# Altium PCB 底板20160428.PcbDoc (part 2 of 5)
Units mm, origin at the board's own origin, x right, y up, seen from the top; angles counter-clockwise.
Board outline 123.5 x 102.51 mm, 2 copper layers (Top Layer, Bottom Layer); 219 components, 217 nets, 791 pads, 260 vias.
Unrouted connection lines stored in the file: 1.
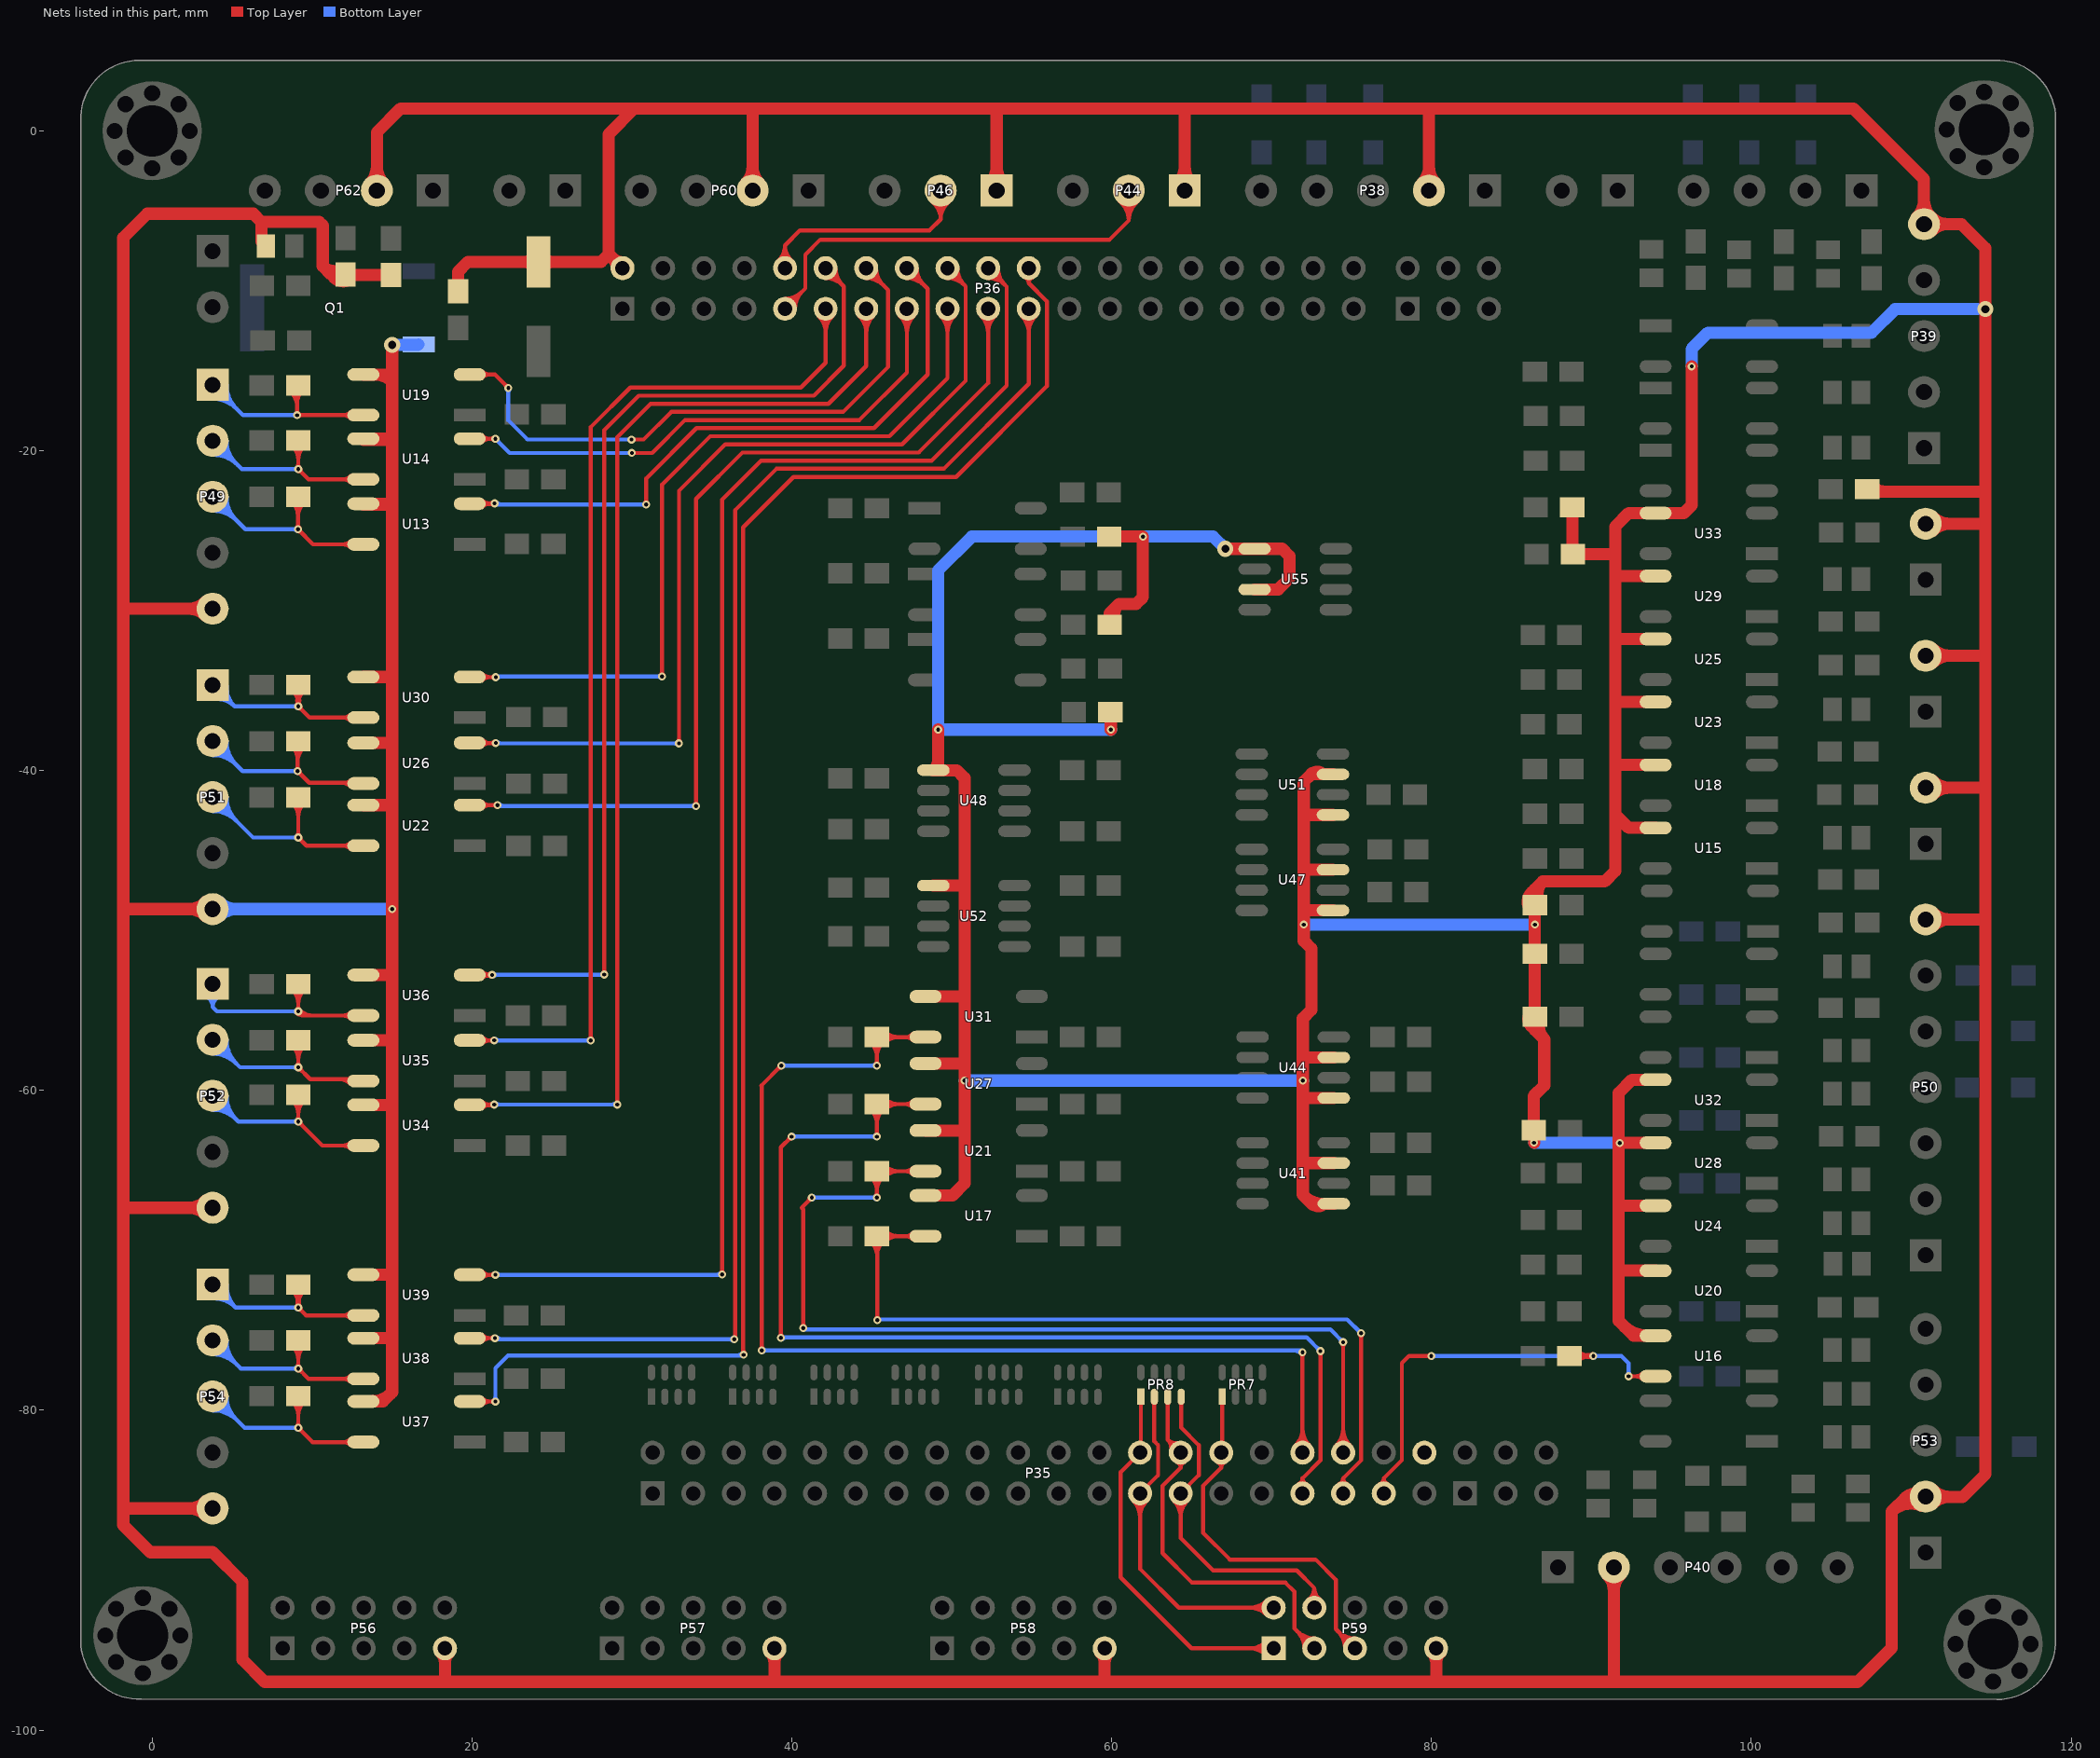
[diagram p2: the nets of this part, all layers, seen from the top]

## Via types
v1: diameter 0.5, hole 0.25, Top Layer to Bottom Layer, 233 vias
v2: diameter 1, hole 0.5, Top Layer to Bottom Layer, 27 vias

## Nets (pads, with @x,y where several pads share a name; then routed paths per layer and width w, separated by ;. In a path a pad name is that pad's centre, name@x,y a point inside that pad or via, vN(x,y) a via of type N, cw(c..) or ccw(c..) an arc to the next point about the centre after c; other vN are vias at no path point) (continued)
CDH4_KR4: P35.30 P59.5 PR7.1 | length 28.4
  Top Layer w0.254: P35.30@66.61,-83.225 cw(c66.454,-83.592) 66.853,-83.592 ; PR7.1@66.836,-79.506 cw(c66.663,-79.68) 66.908,-79.68 cw(c67.153,-79.68) PR7.1@66.98,-79.506 ; PR7.1@66.908,-79.155 66.908,-82.596 P35.30@66.853,-82.652 66.853,-83.592 ; P35.30@67.096,-83.225 ccw(c67.251,-83.592) 66.853,-83.592 ; P59.5@74.586,-94.884 ccw(c73.082,-94.884) 74.146,-93.821 ccw(c75.209,-92.757) P59.5@75.209,-94.261 ; P59.5@74.84,-94.884 ccw(c73.95,-94.884) 74.579,-94.254 ccw(c75.209,-93.625) P59.5@75.209,-94.515 ; P59.5@75.209,-94.884 74.016,-93.691 74.016,-90.602 72.746,-89.332 67.386,-89.332 65.722,-87.667 65.722,-84.723 66.853,-83.592
CDH4_KR5: P35.27 P59.4 PR8.4 | length 26.5
  Top Layer w0.254: P35.27@63.872,-85.632 cw(c62.809,-86.696) 64.313,-86.696 cw(c65.817,-86.696) P35.27@64.753,-85.632 ; P35.27@64.052,-85.453 cw(c63.422,-86.082) 64.313,-86.082 cw(c65.204,-86.082) P35.27@64.574,-85.453 ; PR8.4@64.271,-79.506 cw(c64.097,-79.68) 64.343,-79.68 cw(c64.588,-79.68) PR8.4@64.415,-79.506 ; PR8.4@64.343,-79.155 64.343,-81.082 65.444,-82.183 65.444,-84.061 P35.27@64.313,-85.192 64.313,-87.986 66.345,-90.018 71.577,-90.018 72.669,-91.11 ; P59.4@72.299,-91.843 ccw(c71.758,-91.11) 72.669,-91.11 ; P59.4@72.669,-92.344 72.669,-91.11 ; P59.4@73.039,-91.843 cw(c73.581,-91.11) 72.669,-91.11
CDH4_KR6: P35.28 P59.3 PR8.3 | length 30.4
  Top Layer w0.254: PR8.3@63.433,-79.506 cw(c63.259,-79.68) 63.504,-79.68 cw(c63.75,-79.68) PR8.3@63.576,-79.506 ; PR8.3@63.504,-79.155 63.504,-81.843 ; P35.28@63.704,-82.52 ccw(c62.983,-82.365) 63.504,-81.843 ; P35.28@64.07,-83.225 cw(c63.914,-83.592) 64.313,-83.592 ; P35.28@64.181,-82.043 cw(c64.026,-81.322) 63.504,-81.843 ; P35.28@64.556,-83.225 ccw(c64.711,-83.592) 64.313,-83.592 ; P59.3@72.046,-94.884 ccw(c70.542,-94.884) 71.606,-93.821 ccw(c72.669,-92.757) P59.3@72.669,-94.261 ; P59.3@72.3,-94.884 ccw(c71.41,-94.884) 72.039,-94.254 ccw(c72.669,-93.625) P59.3@72.669,-94.515 ; P59.3@72.669,-94.884 71.425,-93.64 71.425,-91.338 70.866,-90.78 65.024,-90.78 63.182,-88.937 63.182,-84.723 64.313,-83.592 ; 63.504,-81.843 P35.28@64.313,-82.652 64.313,-83.592
CDH4_KR7: P35.25 P59.2 PR8.2 | length 28.6
  Top Layer w0.254: P35.25@61.332,-85.632 cw(c60.269,-86.696) 61.773,-86.696 cw(c63.277,-86.696) P35.25@62.213,-85.632 ; P35.25@61.512,-85.453 cw(c60.882,-86.082) 61.773,-86.082 cw(c62.664,-86.082) P35.25@62.034,-85.453 ; PR8.2@62.594,-79.506 cw(c62.421,-79.68) 62.666,-79.68 cw(c62.912,-79.68) PR8.2@62.738,-79.506 ; PR8.2@62.666,-79.155 62.666,-81.946 62.904,-82.183 62.904,-84.061 P35.25@61.773,-85.192 61.773,-89.916 64.201,-92.344 P59.2@70.129,-92.344 ; P59.2@69.689,-92.785 ccw(c68.625,-93.848) 68.625,-92.344 ccw(c68.625,-90.84) P59.2@69.689,-91.904 ; P59.2@69.868,-92.605 ccw(c69.239,-93.235) 69.239,-92.344 ccw(c69.239,-91.454) P59.2@69.868,-92.083
CDH4_KR8: P35.26 P59.1 PR8.1 | length 27.4
  Top Layer w0.254: PR8.1@61.756,-79.506 cw(c61.583,-79.68) 61.828,-79.68 cw(c62.073,-79.68) PR8.1@61.9,-79.506 ; PR8.1@61.828,-79.155 61.828,-82.596 P35.26@61.773,-82.652 60.554,-83.871 60.554,-90.449 64.989,-94.884 P59.1@70.129,-94.884 ; P59.1@69.689,-95.325 ccw(c68.625,-96.388) 68.625,-94.884 ccw(c68.625,-93.38) P59.1@69.689,-94.444 ; P59.1@69.868,-95.145 ccw(c69.239,-95.775) 69.239,-94.884 ccw(c69.239,-93.994) P59.1@69.868,-94.623
DJ1_KC1: P36.16 U13.3 | length 47.2
  Top Layer w0.254: U13.3@19.863,-23.292 v1(21.412,-23.292) v1@21.416,-23.292 ; U13.3@20.651,-23.509 cw(c21.176,-24.034) v1@21.176,-23.292 ; U13.3@20.651,-23.123 ccw(c21.058,-22.716) 21.058,-23.292 ; 20.967,-23.348 cw(c21.098,-23.836) v1@21.351,-23.398 ; v1@21.325,-23.379 ccw(c21.115,-23.589) 21.115,-23.292 ccw(c21.115,-22.995) v1@21.325,-23.205 ; v1@30.799,-23.281 ccw(c30.589,-23.071) 30.886,-23.071 ccw(c31.183,-23.071) v1@30.973,-23.281 ; v1(30.886,-23.368) 30.886,-21.742 34.036,-18.593 45.136,-18.593 48.489,-15.24 48.489,-9.881 P36.16@47.193,-8.585 ; P36.16@47.193,-9.208 cw(c47.193,-10.712) 48.257,-9.649 cw(c49.32,-8.585) P36.16@47.816,-8.585 ; P36.16@47.193,-8.954 cw(c47.193,-9.845) 47.823,-9.215 cw(c48.453,-8.585) P36.16@47.562,-8.585
  Bottom Layer w0.254: v1(21.412,-23.292) 21.488,-23.368 v1(30.886,-23.368) ; v1@21.499,-23.205 ccw(c21.893,-22.811) 21.893,-23.368 ; v1@30.799,-23.455 ccw(c30.589,-23.665) 30.589,-23.368 ccw(c30.589,-23.071) v1@30.799,-23.281
DJ1_KC2: P36.15 U14.3 | length 39.5
  Top Layer w0.254: U14.3@19.863,-19.253 v1@21.416,-19.253 ; U14.3@20.651,-19.445 cw(c21.115,-19.909) 21.115,-19.253 ; U14.3@20.651,-19.059 ccw(c21.12,-18.591) 21.12,-19.253 ; v1@21.376,-19.34 ccw(c21.166,-19.55) 21.166,-19.253 ccw(c21.166,-18.956) v1@21.376,-19.166 ; v1(29.997,-20.142) 31.267,-20.142 33.325,-18.085 44.221,-18.085 47.193,-15.113 P36.15@47.193,-11.125 ; P36.15@46.753,-11.566 cw(c45.689,-12.629) 47.193,-12.629 cw(c48.697,-12.629) P36.15@47.634,-11.566 ; P36.15@46.932,-11.386 cw(c46.302,-12.016) 47.193,-12.016 cw(c48.084,-12.016) P36.15@47.454,-11.386
  Bottom Layer w0.254: v1@21.463,-19.376 cw(c21.463,-19.673) 21.673,-19.463 cw(c21.883,-19.253) v1@21.586,-19.253 ; v1(21.463,-19.253) 22.352,-20.142 v1(29.997,-20.142)
DJ1_KC3: P36.14 U19.3 | length 43.4
  Top Layer w0.254: U19.3@19.858,-15.239 21.437,-15.239 v1(22.276,-16.078) ; U19.3@20.651,-15.432 cw(c21.117,-15.898) 21.117,-15.239 cw(c21.117,-14.58) U19.3@20.651,-15.046 ; v1@22.153,-16.078 ccw(c21.856,-16.078) 22.066,-15.868 ccw(c22.276,-15.658) v1@22.276,-15.955 ; v1(29.972,-19.304) 30.734,-19.304 32.461,-17.577 43.205,-17.577 46.025,-14.757 46.025,-9.957 P36.14@44.653,-8.585 ; P36.14@44.653,-9.208 cw(c44.653,-10.712) 45.717,-9.649 cw(c46.78,-8.585) P36.14@45.276,-8.585 ; P36.14@44.653,-8.954 cw(c44.653,-9.845) 45.283,-9.215 cw(c45.913,-8.585) P36.14@45.022,-8.585
  Bottom Layer w0.254: v1@22.189,-16.165 cw(c21.979,-16.375) 22.276,-16.375 cw(c22.573,-16.375) v1@22.363,-16.165 ; v1(22.276,-16.078) 22.276,-18.11 23.47,-19.304 v1(29.972,-19.304)
DJ1_KC11: P49.3 R43.1 U13.6 | length 23.2
  Top Layer w0.254: R43.1@8.777,-23.238 cw(c7.952,-24.063) 9.119,-24.063 ; v1@9.032,-24.83 ccw(c8.822,-24.62) 9.119,-24.62 ccw(c9.416,-24.62) v1@9.206,-24.83 ; v1@9.119,-25.04 cw(c9.119,-25.337) 9.329,-25.127 cw(c9.539,-24.917) v1@9.242,-24.917 ; 9.119,-24.147 cw(c10.405,-24.147) R43.1@9.495,-23.238 ; 9.119,-23.534 cw(c9.792,-23.534) R43.1@9.316,-23.058 ; R43.1@9.136,-22.879 9.119,-22.896 v1(9.119,-24.917) 10.057,-25.856 U13.6@13.208,-25.856 ; U13.6@12.415,-26.049 ccw(c11.949,-26.515) 11.949,-25.856 ccw(c11.949,-25.197) U13.6@12.415,-25.663
  Bottom Layer w0.254: P49.3@3.785,-23.756 cw(c3.785,-25.884) 5.289,-24.379 ; P49.3@3.785,-23.502 cw(c3.785,-25.016) 4.856,-23.945 ; P49.3@3.789,-22.879 5.828,-24.917 v1(9.119,-24.917) ; P49.3@4.404,-22.883 ccw(c5.878,-22.883) 4.835,-23.925 ; P49.3@4.658,-22.883 ccw(c6.745,-22.883) 5.269,-24.359 ; v1@9.032,-25.004 ccw(c8.822,-25.214) 8.822,-24.917 ccw(c8.822,-24.62) v1@9.032,-24.83
DJ1_KC22: P49.2 R45.1 U14.6 | length 22.2
  Top Layer w0.254: R45.1@8.777,-19.714 cw(c7.91,-20.581) 9.136,-20.581 cw(c10.363,-20.581) R45.1@9.495,-19.714 ; v1@9.049,-21.063 ccw(c8.839,-20.853) 9.136,-20.853 ccw(c9.433,-20.853) v1@9.223,-21.063 ; v1@9.136,-21.273 cw(c9.136,-21.57) 9.346,-21.36 cw(c9.556,-21.15) v1@9.259,-21.15 ; R45.1@9.136,-19.355 v1(9.136,-21.15) 9.778,-21.792 U14.6@13.208,-21.792 ; U14.6@12.415,-21.985 ccw(c11.949,-22.451) 11.949,-21.792 ccw(c11.949,-21.133) U14.6@12.415,-21.599
  Bottom Layer w0.254: P49.2@3.785,-20.256 cw(c3.785,-22.499) 5.371,-20.913 ; P49.2@3.785,-20.002 cw(c3.785,-21.631) 4.937,-20.479 ; P49.2@3.813,-19.355 5.608,-21.15 v1(9.136,-21.15) ; P49.2@4.404,-19.383 ccw(c5.763,-19.383) 4.802,-20.344 ; P49.2@4.658,-19.383 ccw(c6.63,-19.383) 5.235,-20.777 ; v1@9.049,-21.237 ccw(c8.839,-21.447) 8.839,-21.15 ccw(c8.839,-20.853) v1@9.049,-21.063
DJ1_KC33: P49.1 R54.1 U19.6 | length 22.7
  Top Layer w0.254: R54.1@8.65,-16.278 cw(c7.641,-17.287) 9.068,-17.287 ; R54.1@8.83,-16.099 cw(c8.254,-16.674) 9.068,-16.674 ; v1@8.981,-17.693 ccw(c8.771,-17.483) 9.068,-17.483 ccw(c9.365,-17.483) 9.155,-17.693 ccw(c9.365,-17.483) 9.365,-17.78 ccw(c9.365,-18.077) v1@9.155,-17.867 ; 9.068,-17.004 cw(c10.094,-17.004) R54.1@9.368,-16.278 ; R54.1@9.136,-15.919 9.068,-15.987 v1(9.068,-17.78) 9.65,-17.78 9.651,-17.779 U19.6@13.208,-17.779 ; U19.6@12.415,-17.972 ccw(c11.949,-18.438) 11.949,-17.779 ccw(c11.949,-17.12) U19.6@12.415,-17.586
  Bottom Layer w0.254: P49.1@3.785,-16.756 cw(c3.785,-18.863) 5.275,-17.373 cw(c6.765,-15.883) P49.1@4.658,-15.883 ; P49.1@3.785,-16.502 cw(c3.785,-17.996) 4.841,-16.94 cw(c5.898,-15.883) P49.1@4.404,-15.883 ; P49.1@3.821,-15.919 5.682,-17.78 v1(9.068,-17.78) ; v1@8.981,-17.867 ccw(c8.771,-18.077) 8.771,-17.78 ccw(c8.771,-17.483) v1@8.981,-17.693
DJ2_KC1: P36.19 U22.3 | length 65.9
  Top Layer w0.254: U22.3@19.859,-42.164 v1(21.59,-42.164) ; U22.3@20.651,-42.356 cw(c21.115,-42.82) 21.115,-42.164 ; U22.3@20.651,-41.97 ccw(c21.12,-41.501) 21.12,-42.164 ; v1@21.503,-42.251 ccw(c21.293,-42.461) 21.293,-42.164 ccw(c21.293,-41.867) v1@21.503,-42.077 ; v1@33.924,-42.128 ccw(c33.714,-41.918) 34.011,-41.918 ccw(c34.308,-41.918) v1@34.098,-42.128 ; v1(34.011,-42.215) 34.011,-23.012 36.906,-20.117 47.93,-20.117 52.273,-15.773 P36.19@52.273,-11.125 ; P36.19@51.833,-11.566 cw(c50.769,-12.629) 52.273,-12.629 cw(c53.777,-12.629) P36.19@52.714,-11.566 ; P36.19@52.012,-11.386 cw(c51.382,-12.016) 52.273,-12.016 cw(c53.164,-12.016) P36.19@52.534,-11.386
  Bottom Layer w0.254: v1(21.59,-42.164) 21.641,-42.215 v1(34.011,-42.215) ; v1@21.677,-42.077 ccw(c22.01,-41.744) 22.01,-42.215 ; v1@33.924,-42.302 ccw(c33.714,-42.512) 33.714,-42.215 ccw(c33.714,-41.918) v1@33.924,-42.128
DJ2_KC2: P36.18 U26.3 | length 63.7
  Top Layer w0.254: U26.3@19.866,-38.278 v1(21.488,-38.278) ; U26.3@20.651,-38.463 cw(c21.098,-38.91) 21.098,-38.278 ; U26.3@20.651,-38.077 ccw(c21.136,-37.592) 21.136,-38.278 ; v1@21.401,-38.365 ccw(c21.191,-38.575) 21.191,-38.278 ccw(c21.191,-37.981) v1@21.401,-38.191 ; v1@32.857,-38.216 ccw(c32.647,-38.006) 32.944,-38.006 ccw(c33.241,-38.006) v1@33.031,-38.216 ; v1(32.944,-38.303) 32.944,-22.504 35.839,-19.609 46.888,-19.609 50.869,-15.628 50.869,-9.721 P36.18@49.733,-8.585 ; P36.18@49.733,-9.208 cw(c49.733,-10.712) 50.797,-9.649 cw(c51.86,-8.585) P36.18@50.356,-8.585 ; P36.18@49.733,-8.954 cw(c49.733,-9.845) 50.363,-9.215 cw(c50.993,-8.585) P36.18@50.102,-8.585
  Bottom Layer w0.254: v1(21.488,-38.278) 21.514,-38.303 v1(32.944,-38.303) ; v1@21.575,-38.191 ccw(c21.847,-37.92) 21.847,-38.303 ; v1@32.857,-38.39 ccw(c32.647,-38.6) 32.647,-38.303 ccw(c32.647,-38.006) v1@32.857,-38.216
DJ2_KC3: P36.17 U30.3 | length 55.6
  Top Layer w0.254: U30.3@19.871,-34.163 v1(21.488,-34.163) ; U30.3@20.651,-34.343 cw(c21.087,-34.779) 21.087,-34.163 ; U30.3@20.651,-33.957 ccw(c21.147,-33.461) 21.147,-34.163 ; v1@21.401,-34.25 ccw(c21.191,-34.46) 21.191,-34.163 ccw(c21.191,-33.866) v1@21.401,-34.076 ; v1@31.79,-34.025 ccw(c31.58,-33.815) 31.877,-33.815 ccw(c32.174,-33.815) v1@31.964,-34.025 ; v1(31.877,-34.112) 31.877,-22.123 34.9,-19.101 46.101,-19.101 49.733,-15.469 P36.17@49.733,-11.125 ; P36.17@49.293,-11.566 cw(c48.229,-12.629) 49.733,-12.629 cw(c51.237,-12.629) P36.17@50.174,-11.566 ; P36.17@49.472,-11.386 cw(c48.842,-12.016) 49.733,-12.016 cw(c50.624,-12.016) P36.17@49.994,-11.386
  Bottom Layer w0.254: v1@21.539,-34.214 v1(21.488,-34.163) 21.539,-34.112 v1(31.877,-34.112) ; v1@21.575,-34.25 cw(c21.908,-34.583) 21.908,-34.112 ; v1@31.79,-34.199 ccw(c31.58,-34.409) 31.58,-34.112 ccw(c31.58,-33.815) v1@31.79,-34.025
DJ2_KC11: P51.3 R61.1 U22.6 | length 23.2
  Top Layer w0.254: R61.1@8.777,-42.034 cw(c7.91,-42.901) 9.136,-42.901 cw(c10.363,-42.901) R61.1@9.495,-42.034 ; v1@9.049,-44.101 ccw(c8.839,-43.891) 9.136,-43.891 ccw(c9.433,-43.891) v1@9.223,-44.101 ; v1@9.136,-44.311 cw(c9.136,-44.608) 9.346,-44.398 cw(c9.556,-44.188) v1@9.259,-44.188 ; R61.1@9.136,-41.675 v1(9.136,-44.188) 9.651,-44.703 U22.6@13.208,-44.703 ; U22.6@12.415,-44.896 ccw(c11.949,-45.362) 11.949,-44.703 ccw(c11.949,-44.044) U22.6@12.415,-44.51
  Bottom Layer w0.254: P51.3@3.785,-42.535 cw(c3.785,-44.643) 5.275,-43.153 cw(c6.765,-41.662) P51.3@4.658,-41.662 ; P51.3@3.785,-42.281 cw(c3.785,-43.776) 4.841,-42.719 cw(c5.898,-41.662) P51.3@4.404,-41.662 ; P51.3@3.797,-41.675 6.311,-44.188 v1(9.136,-44.188) ; v1@9.049,-44.275 ccw(c8.839,-44.485) 8.839,-44.188 ccw(c8.839,-43.891) v1@9.049,-44.101
DJ2_KC22: P51.2 R69.1 U26.6 | length 23
  Top Layer w0.254: R69.1@8.777,-38.529 cw(c8.013,-39.292) 9.093,-39.292 ; v1@9.006,-39.943 ccw(c8.796,-39.733) 9.093,-39.733 ccw(c9.39,-39.733) v1@9.18,-39.943 ; v1@9.093,-40.153 cw(c9.093,-40.45) 9.303,-40.24 cw(c9.513,-40.03) v1@9.216,-40.03 ; 9.093,-39.499 cw(c10.466,-39.499) R69.1@9.495,-38.529 ; 9.093,-38.886 cw(c9.853,-38.886) R69.1@9.316,-38.349 ; R69.1@9.136,-38.169 9.093,-38.212 v1(9.093,-40.03) 9.823,-40.76 13.208,-40.76 U26.6@13.208,-40.81 ; 11.829,-40.76 cw(c11.829,-41.589) U26.6@12.415,-41.003 ; 12.069,-40.76 ccw(c12.069,-40.271) U26.6@12.415,-40.617
  Bottom Layer w0.254: P51.2@3.785,-39.035 cw(c3.785,-41.143) 5.275,-39.653 cw(c6.765,-38.162) P51.2@4.658,-38.162 ; P51.2@3.785,-38.781 cw(c3.785,-40.276) 4.841,-39.219 cw(c5.898,-38.162) P51.2@4.404,-38.162 ; P51.2@3.792,-38.169 5.653,-40.03 v1(9.093,-40.03) ; v1@9.006,-40.117 ccw(c8.796,-40.327) 8.796,-40.03 ccw(c8.796,-39.733) v1@9.006,-39.943
DJ2_KC33: P51.1 R77.1 U30.6 | length 21.4
  Top Layer w0.254: R77.1@8.777,-34.998 cw(c7.91,-35.865) 9.136,-35.865 cw(c10.363,-35.865) R77.1@9.495,-34.998 ; v1@9.03,-35.922 ccw(c8.682,-35.722) 9.07,-35.618 ; v1@9.049,-35.897 ccw(c8.839,-35.687) 9.136,-35.687 ccw(c9.433,-35.687) v1@9.223,-35.897 ; v1@9.136,-36.107 cw(c9.136,-36.404) 9.346,-36.194 cw(c9.556,-35.984) v1@9.259,-35.984 ; R77.1@9.136,-34.639 v1(9.136,-35.984) 9.843,-36.69 U30.6@13.208,-36.69 ; 9.203,-35.618 ccw(c9.591,-35.722) v1@9.243,-35.922 ; U30.6@12.415,-36.883 ccw(c11.949,-37.35) 11.949,-36.69 ccw(c11.949,-36.031) U30.6@12.415,-36.497
  Bottom Layer w0.254: P51.1@3.808,-34.639 5.153,-35.984 v1(9.136,-35.984) ; P51.1@3.849,-35.278 cw(c3.967,-36.416) P51.1@4.776,-35.607 ; P51.1@3.875,-35.531 cw(c4.038,-37.099) 5.153,-35.984 cw(c6.356,-34.781) P51.1@4.657,-34.703 ; P51.1@4.403,-34.691 ccw(c5.578,-34.745) P51.1@4.746,-35.577 ; v1@9.049,-36.071 ccw(c8.839,-36.281) 8.839,-35.984 ccw(c8.839,-35.687) v1@9.049,-35.897
DJ3_KC1: P36.13 U34.3 | length 78.5
  Top Layer w0.254: U34.3@19.858,-60.908 19.882,-60.884 v1(21.387,-60.884) ; U34.3@20.651,-61.101 cw(c21.176,-61.626) v1@21.176,-60.884 ; U34.3@20.651,-60.715 ccw(c21.058,-60.308) 21.058,-60.884 ; 20.959,-60.942 cw(c21.084,-61.409) v1@21.325,-60.99 ; v1@21.3,-60.971 ccw(c21.09,-61.181) 21.09,-60.884 ccw(c21.09,-60.587) v1@21.3,-60.797 ; v1(29.083,-60.884) 29.083,-19.152 31.166,-17.069 42.291,-17.069 44.653,-14.707 P36.13@44.653,-11.125 ; P36.13@44.213,-11.566 cw(c43.149,-12.629) 44.653,-12.629 cw(c46.157,-12.629) P36.13@45.094,-11.566 ; P36.13@44.392,-11.386 cw(c43.762,-12.016) 44.653,-12.016 cw(c45.544,-12.016) P36.13@44.914,-11.386
  Bottom Layer w0.254: v1(21.387,-60.884) v1(29.083,-60.884) ; v1@21.474,-60.971 cw(c21.684,-61.181) 21.684,-60.884 cw(c21.684,-60.587) v1@21.474,-60.797 ; v1@28.996,-60.971 ccw(c28.786,-61.181) 28.786,-60.884 ccw(c28.786,-60.587) v1@28.996,-60.797
DJ3_KC2: P36.11 U35.3 | length 72.3
  Top Layer w0.254: U35.3@19.858,-56.87 v1(21.386,-56.87) ; U35.3@20.651,-57.063 cw(c21.117,-57.529) 21.117,-56.87 cw(c21.117,-56.211) U35.3@20.651,-56.677 ; v1@21.299,-56.957 ccw(c21.089,-57.167) 21.089,-56.87 ccw(c21.089,-56.573) v1@21.299,-56.783 ; v1@27.345,-56.784 ccw(c27.135,-56.574) 27.432,-56.574 ccw(c27.729,-56.574) v1@27.519,-56.784 ; v1(27.432,-56.871) 27.432,-18.517 29.896,-16.053 40.564,-16.053 42.113,-14.503 P36.11@42.113,-11.125 ; P36.11@41.673,-11.566 cw(c40.609,-12.629) 42.113,-12.629 cw(c43.617,-12.629) P36.11@42.554,-11.566 ; P36.11@41.852,-11.386 cw(c41.222,-12.016) 42.113,-12.016 cw(c43.004,-12.016) P36.11@42.374,-11.386
  Bottom Layer w0.254: v1(21.386,-56.87) v1(27.432,-56.871) v1(27.432,-56.871) ; v1@21.473,-56.957 cw(c21.683,-57.167) 21.683,-56.87 cw(c21.683,-56.573) v1@21.473,-56.783 ; 27.133,-56.87 cw(c27.133,-57.17) v1@27.345,-56.958 ; 27.138,-56.87 ccw(c27.138,-56.576) v1@27.345,-56.784
DJ3_KC3: P36.12 U36.3 | length 72.8
  Top Layer w0.254: U36.3@19.858,-52.78 v1(21.259,-52.78) ; U36.3@20.651,-52.973 cw(c21.117,-53.439) 21.117,-52.78 cw(c21.117,-52.121) U36.3@20.651,-52.587 ; 20.877,-52.845 cw(c20.986,-53.252) v1@21.197,-52.887 ; 20.877,-52.716 ccw(c20.986,-52.308) v1@21.197,-52.674 ; v1@21.172,-52.867 ccw(c20.962,-53.077) 20.962,-52.78 ccw(c20.962,-52.483) v1@21.172,-52.693 ; v1@28.183,-52.669 ccw(c27.973,-52.459) 28.27,-52.459 ccw(c28.567,-52.459) v1@28.357,-52.669 ; v1(28.27,-52.756) 28.27,-18.72 30.429,-16.561 41.377,-16.561 43.253,-14.685 43.253,-9.725 P36.12@42.113,-8.585 ; P36.12@42.113,-9.208 cw(c42.113,-10.712) 43.177,-9.649 cw(c44.24,-8.585) P36.12@42.736,-8.585 ; P36.12@42.113,-8.954 cw(c42.113,-9.845) 42.743,-9.215 cw(c43.373,-8.585) P36.12@42.482,-8.585
  Bottom Layer w0.254: v1(21.259,-52.78) 28.246,-52.78 v1(28.27,-52.756) ; v1@21.346,-52.867 cw(c21.556,-53.077) 21.556,-52.78 cw(c21.556,-52.483) v1@21.346,-52.693 ; 27.914,-52.78 ccw(c27.914,-52.4) v1@28.183,-52.669
DJ3_KC11: P52.3 R85.1 U34.6 | length 22.4
  Top Layer w0.254: R85.1@8.777,-60.627 cw(c7.91,-61.494) 9.136,-61.494 cw(c10.363,-61.494) R85.1@9.495,-60.627 ; v1@9.049,-61.856 ccw(c8.839,-61.646) 9.136,-61.646 ccw(c9.433,-61.646) v1@9.223,-61.856 ; v1@9.136,-62.066 cw(c9.136,-62.363) 9.346,-62.153 cw(c9.556,-61.943) v1@9.259,-61.943 ; R85.1@9.136,-60.267 v1(9.136,-61.943) 10.642,-63.448 U34.6@13.208,-63.448 ; U34.6@12.415,-63.641 ccw(c11.949,-64.107) 11.949,-63.448 ccw(c11.949,-62.789) U34.6@12.415,-63.255
  Bottom Layer w0.254: P52.3@3.785,-61.212 cw(c3.785,-63.32) 5.275,-61.829 cw(c6.765,-60.339) P52.3@4.658,-60.339 ; P52.3@3.785,-60.958 cw(c3.785,-62.452) 4.841,-61.396 cw(c5.898,-60.339) P52.3@4.404,-60.339 ; P52.3@3.785,-60.339 5.388,-61.943 v1(9.136,-61.943) ; v1@9.049,-62.03 ccw(c8.839,-62.24) 8.839,-61.943 ccw(c8.839,-61.646) v1@9.049,-61.856
DJ3_KC22: P52.2 R87.1 U35.6 | length 22.3
  Top Layer w0.254: R87.1@8.777,-57.223 cw(c7.91,-58.09) 9.136,-58.09 cw(c10.363,-58.09) R87.1@9.495,-57.223 ; v1@9.049,-58.468 ccw(c8.839,-58.258) 9.136,-58.258 ccw(c9.433,-58.258) v1@9.223,-58.468 ; v1@9.136,-58.678 cw(c9.136,-58.975) 9.346,-58.765 cw(c9.556,-58.555) v1@9.259,-58.555 ; R87.1@9.136,-56.864 v1(9.136,-58.555) 9.883,-59.302 13.208,-59.302 U35.6@13.208,-59.41 ; 11.69,-59.302 cw(c11.69,-60.328) U35.6@12.415,-59.603 ; 12.208,-59.302 ccw(c12.208,-59.01) U35.6@12.415,-59.217
  Bottom Layer w0.254: P52.2@3.785,-57.712 cw(c3.785,-59.82) 5.275,-58.329 cw(c6.765,-56.839) P52.2@4.658,-56.839 ; P52.2@3.785,-57.458 cw(c3.785,-58.952) 4.841,-57.896 cw(c5.898,-56.839) P52.2@4.404,-56.839 ; P52.2@3.785,-56.839 5.5,-58.555 v1(9.136,-58.555) ; v1@9.049,-58.642 ccw(c8.839,-58.852) 8.839,-58.555 ccw(c8.839,-58.258) v1@9.049,-58.468
DJ3_KC33: P52.1 R89.1 U36.6 | length 21.4
  Top Layer w0.254: R89.1@8.777,-53.718 cw(c7.91,-54.585) 9.136,-54.585 cw(c10.363,-54.585) R89.1@9.495,-53.718 ; v1@9.043,-55.152 ccw(c9.45,-54.746) 9.45,-55.32 ; v1@9.049,-54.972 ccw(c8.839,-54.762) 9.136,-54.762 ccw(c9.433,-54.762) 9.223,-54.972 ccw(c10.063,-54.133) 10.063,-55.32 ; v1@9.136,-55.182 cw(c9.136,-55.479) 9.346,-55.269 cw(c9.556,-55.059) v1@9.259,-55.059 ; R89.1@9.136,-53.359 v1(9.136,-55.059) 9.397,-55.32 U36.6@13.208,-55.32 ; U36.6@12.415,-55.513 ccw(c11.949,-55.979) 11.949,-55.32 ccw(c11.949,-54.661) U36.6@12.415,-55.127
  Bottom Layer w0.254: P52.1@3.377,-54.111 cw(c3.019,-54.788) 3.785,-54.788 ; P52.1@3.495,-53.886 cw(c3.242,-54.366) 3.785,-54.366 cw(c4.327,-54.366) P52.1@4.074,-53.886 ; P52.1@3.785,-53.339 3.785,-54.788 ; P52.1@4.192,-54.111 ccw(c4.55,-54.788) 3.785,-54.788 ; v1@9.049,-55.146 ccw(c8.839,-55.356) 8.839,-55.059 ccw(c8.839,-54.762) v1@9.049,-54.972 ; v1(9.136,-55.059) 4.056,-55.059 3.785,-54.788
DJ4_KC1: P36.22 U37.3 | length 105.4
  Top Layer w0.254: U37.3@19.859,-79.451 v1(21.463,-79.451) ; U37.3@20.651,-79.643 cw(c21.115,-80.107) 21.115,-79.451 ; U37.3@20.651,-79.257 ccw(c21.12,-78.789) 21.12,-79.451 ; v1@21.376,-79.538 ccw(c21.166,-79.748) 21.166,-79.451 ccw(c21.166,-79.154) v1@21.376,-79.364 ; 36.957,-76.172 ccw(c37.341,-76.172) v1@37.069,-76.443 ; v1(36.982,-76.53) 36.957,-76.505 36.957,-24.79 40.107,-21.641 50.267,-21.641 55.944,-15.963 55.944,-10.657 54.813,-9.526 ; P36.22@54.57,-9.159 cw(c54.415,-9.526) 54.813,-9.526 ; P36.22@54.813,-8.585 54.813,-9.526 ; P36.22@55.056,-9.159 ccw(c55.212,-9.526) 54.813,-9.526
  Bottom Layer w0.254: v1@21.376,-79.364 ccw(c21.166,-79.154) 21.463,-79.154 ccw(c21.76,-79.154) v1@21.55,-79.364 ; v1(21.463,-79.451) 21.463,-77.368 22.251,-76.58 36.933,-76.58 v1(36.982,-76.53) ; 36.565,-76.58 ccw(c36.565,-76.113) v1@36.895,-76.443
DJ4_KC2: P36.21 U38.3 | length 100.9
  Top Layer w0.254: U38.3@19.862,-75.489 v1(21.438,-75.489) ; U38.3@20.651,-75.685 cw(c21.126,-76.16) 21.126,-75.489 ; U38.3@20.651,-75.299 ccw(c21.108,-74.842) 21.108,-75.489 ; v1@21.351,-75.576 ccw(c21.141,-75.786) 21.141,-75.489 ccw(c21.141,-75.192) v1@21.351,-75.402 ; v1(36.398,-75.565) 36.449,-75.514 36.449,-23.724 39.04,-21.133 49.505,-21.133 54.813,-15.824 P36.21@54.813,-11.125 ; P36.21@54.373,-11.566 cw(c53.309,-12.629) 54.813,-12.629 cw(c56.317,-12.629) P36.21@55.254,-11.566 ; P36.21@54.552,-11.386 cw(c53.922,-12.016) 54.813,-12.016 cw(c55.704,-12.016) P36.21@55.074,-11.386
  Bottom Layer w0.254: v1(21.438,-75.489) 21.514,-75.565 v1(36.398,-75.565) ; v1@21.525,-75.402 ccw(c21.919,-75.008) 21.919,-75.565 ; v1@36.311,-75.652 ccw(c36.101,-75.862) 36.101,-75.565 ccw(c36.101,-75.268) v1@36.311,-75.478
DJ4_KC3: P36.20 U39.3 | length 99.3
  Top Layer w0.254: U39.3@19.858,-71.525 19.859,-71.526 v1(21.463,-71.526) ; U39.3@20.651,-71.718 cw(c21.115,-72.182) 21.115,-71.526 ; U39.3@20.651,-71.332 ccw(c21.12,-70.864) 21.12,-71.526 ; v1@21.376,-71.613 ccw(c21.166,-71.823) 21.166,-71.526 ccw(c21.166,-71.229) v1@21.376,-71.439 ; v1@35.549,-71.414 ccw(c35.339,-71.204) 35.636,-71.204 ccw(c35.933,-71.204) v1@35.723,-71.414 ; v1(35.636,-71.501) 35.636,-23.063 38.075,-20.625 48.743,-20.625 53.434,-15.933 53.434,-9.746 P36.20@52.273,-8.585 ; P36.20@52.273,-9.208 cw(c52.273,-10.712) 53.337,-9.649 cw(c54.4,-8.585) P36.20@52.896,-8.585 ; P36.20@52.273,-8.954 cw(c52.273,-9.845) 52.903,-9.215 cw(c53.533,-8.585) P36.20@52.642,-8.585
  Bottom Layer w0.254: v1(21.463,-71.526) 35.611,-71.526 v1(35.636,-71.501) ; v1@21.55,-71.613 cw(c21.76,-71.823) 21.76,-71.526 cw(c21.76,-71.229) v1@21.55,-71.439 ; 35.278,-71.526 ccw(c35.278,-71.143) v1@35.549,-71.414
DJ4_KC11: P54.3 R91.1 U37.6 | length 22.6
  Top Layer w0.254: R91.1@8.777,-79.473 cw(c7.91,-80.341) 9.136,-80.341 cw(c10.363,-80.341) R91.1@9.495,-79.473 ; v1@9.049,-81.007 ccw(c8.839,-80.797) 9.136,-80.797 ccw(c9.433,-80.797) v1@9.223,-81.007 ; v1@9.136,-81.217 cw(c9.136,-81.514) 9.346,-81.304 cw(c9.556,-81.094) v1@9.259,-81.094 ; R91.1@9.136,-79.114 v1(9.136,-81.094) 10.032,-81.99 U37.6@13.208,-81.99 ; U37.6@12.415,-82.183 ccw(c11.949,-82.649) 11.949,-81.99 ccw(c11.949,-81.331) U37.6@12.415,-81.797
  Bottom Layer w0.254: P54.3@3.785,-80.009 cw(c3.785,-82.222) 5.349,-80.657 ; P54.3@3.785,-79.755 cw(c3.785,-81.355) 4.916,-80.223 ; P54.3@3.806,-79.114 5.786,-81.094 v1(9.136,-81.094) ; P54.3@4.404,-79.136 ccw(c5.793,-79.136) 4.811,-80.118 ; P54.3@4.658,-79.136 ccw(c6.66,-79.136) 5.244,-80.552 ; v1@9.049,-81.181 ccw(c8.839,-81.391) 8.839,-81.094 ccw(c8.839,-80.797) v1@9.049,-81.007
DJ4_KC22: P54.2 R93.1 U38.6 | length 22.2
  Top Layer w0.254: R93.1@8.777,-75.994 cw(c7.91,-76.861) 9.136,-76.861 cw(c10.363,-76.861) R93.1@9.495,-75.994 ; v1@9.049,-77.299 ccw(c8.839,-77.089) 9.136,-77.089 ccw(c9.433,-77.089) v1@9.223,-77.299 ; v1@9.136,-77.509 cw(c9.136,-77.806) 9.346,-77.596 cw(c9.556,-77.386) v1@9.259,-77.386 ; R93.1@9.136,-75.634 v1(9.136,-77.386) 9.783,-78.032 U38.6@13.208,-78.032 ; U38.6@12.415,-78.225 ccw(c11.949,-78.691) 11.949,-78.032 ccw(c11.949,-77.373) U38.6@12.415,-77.839
  Bottom Layer w0.254: P54.2@3.785,-76.509 cw(c3.785,-78.624) 5.28,-77.129 ; P54.2@3.785,-76.255 cw(c3.785,-77.757) 4.847,-76.695 ; P54.2@3.786,-75.634 5.538,-77.386 v1(9.136,-77.386) ; P54.2@4.404,-75.636 ccw(c5.89,-75.636) 4.839,-76.687 ; P54.2@4.658,-75.636 ccw(c6.758,-75.636) 5.273,-77.121 ; v1@9.049,-77.473 ccw(c8.839,-77.683) 8.839,-77.386 ccw(c8.839,-77.089) v1@9.049,-77.299
DJ4_KC33: P54.1 R95.1 U39.6 | length 22
  Top Layer w0.254: R95.1@8.777,-72.514 cw(c7.91,-73.381) 9.136,-73.381 cw(c10.363,-73.381) R95.1@9.495,-72.514 ; v1@9.03,-73.514 ccw(c8.623,-73.28) 9.076,-73.158 ; v1@9.049,-73.489 ccw(c8.839,-73.279) 9.136,-73.279 ccw(c9.433,-73.279) v1@9.223,-73.489 ; v1@9.136,-73.699 cw(c9.136,-73.996) 9.346,-73.786 cw(c9.556,-73.576) v1@9.259,-73.576 ; R95.1@9.136,-72.155 v1(9.136,-73.576) 9.626,-74.065 U39.6@13.208,-74.065 ; 9.196,-73.158 ccw(c9.649,-73.28) v1@9.243,-73.514 ; U39.6@12.415,-74.258 ccw(c11.949,-74.724) 11.949,-74.065 ccw(c11.949,-73.406) U39.6@12.415,-73.872
  Bottom Layer w0.254: P54.1@3.8,-72.755 cw(c3.834,-74.129) 4.806,-73.157 cw(c5.777,-72.185) P54.1@4.403,-72.151 ; P54.1@3.806,-73.009 cw(c3.854,-74.946) 5.224,-73.576 ; P54.1@3.835,-72.187 5.225,-73.576 ; P54.1@4.657,-72.158 ccw(c6.595,-72.205) 5.224,-73.576 ; v1@9.049,-73.663 ccw(c8.839,-73.873) 8.839,-73.576 ccw(c8.839,-73.279) v1@9.049,-73.489 ; v1(9.136,-73.576) 5.225,-73.576
DWQ1: P36.9 P44.2 | length 35.3
  Top Layer w0.254: P36.9@39.573,-11.125 40.843,-9.855 40.843,-7.747 41.783,-6.807 59.868,-6.807 61.067,-5.608 ; P36.9@39.573,-10.756 ccw(c39.573,-9.865) 40.203,-10.495 ccw(c40.833,-11.125) P36.9@39.942,-11.125 ; P36.9@39.573,-10.502 ccw(c39.573,-8.998) 40.637,-10.062 ccw(c41.7,-11.125) P36.9@40.196,-11.125 ; P44.2@60.505,-4.402 cw(c59.491,-5.608) 61.067,-5.608 ; P44.2@60.668,-4.208 cw(c59.95,-5.063) 61.067,-5.063 cw(c62.184,-5.063) P44.2@61.465,-4.208 ; P44.2@61.067,-3.734 61.067,-5.608 ; P44.2@61.629,-4.402 ccw(c62.642,-5.608) 61.067,-5.608
DWQ2: P36.10 P46.2 | length 21.5
  Top Layer w0.254: P36.10@39.151,-8.127 ccw(c38.261,-7.163) 39.573,-7.163 ; P36.10@39.323,-8.314 ccw(c38.796,-7.743) 39.573,-7.743 ccw(c40.35,-7.743) P36.10@39.823,-8.314 ; P36.10@39.573,-8.585 39.573,-7.163 ; P36.10@39.996,-8.127 cw(c40.885,-7.163) 39.573,-7.163 ; P46.2@48.767,-4.42 cw(c47.891,-5.532) 49.307,-5.532 ; P46.2@48.924,-4.22 cw(c48.303,-5.009) 49.307,-5.009 cw(c50.31,-5.009) P46.2@49.689,-4.22 ; P46.2@49.307,-3.734 49.307,-5.532 ; P46.2@49.847,-4.42 ccw(c50.722,-5.532) 49.307,-5.532 ; 39.573,-7.163 40.513,-6.223 48.616,-6.223 49.307,-5.532
GND24_B: C1.1 C2.2 C3.1 D41.K P35.40 P36.2 P38.2 P39.5 P40.2 P43.2 P44.1 P45.2 P46.1 P47.2 P49.5 P50.7 P51.5 P52.5 P53.2 P54.5 P56.9 P57.9 P58.9 P59.9 P60.2 P62.2 Q1.3 R1.2 R99.1 R103.1 R108.1 R112.1 R118.1 R124.1 R128.1 R135.1 R140.1 R144.1 U13.4 U14.4 U15.4 U16.4 U17.4 U18.4 U19.4 U20.4 U21.4 U22.4 U23.4 U24.4 U25.4 U26.4 U27.4 U28.4 U29.4 U30.4 U31.4 U32.4 U33.4 U34.4 U35.4 U36.4 U37.4 U38.4 U39.4 U41.1 U41.3 U44.1 U44.3 U47.1 U47.3 U48.5 U51.1 U51.3 U52.5 U55.1 U55.3 | length 1010.2
  Top Layer w0.762: -1.757,-86.136 P54.5@3.785,-86.136 ; P54.5@3.347,-86.574 ccw(c2.29,-87.63) 2.29,-86.136 ccw(c2.29,-84.642) P54.5@3.347,-85.698 ; P52.5@3.347,-67.777 ccw(c2.29,-68.833) 2.29,-67.339 ccw(c2.29,-65.845) P52.5@3.347,-66.901 ; P51.5@3.347,-49.1 ccw(c2.29,-50.157) 2.29,-48.662 ccw(c2.29,-47.168) P51.5@3.347,-48.225 ; P49.5@3.347,-30.321 ccw(c2.29,-31.377) 2.29,-29.883 ccw(c2.29,-28.388) P49.5@3.347,-29.445 ; P52.5@3.785,-67.339 -1.774,-67.339 -1.803,-67.31 ; P51.5@3.785,-48.662 -1.655,-48.662 -1.803,-48.514 ; P49.5@3.785,-29.883 -1.765,-29.883 -1.803,-29.921 ; D41.K@6.833,-6.909 6.833,-5.69 ; 11.385,-9.175 ccw(c11.95,-8.61) C1.1@12.336,-9.309 ; C1.1@11.968,-8.642 cw(c11.44,-7.686) 10.668,-8.458 ; C1.1@12.27,-8.812 ccw(c12.765,-8.317) 12.765,-9.017 ; U37.4@13.208,-79.45 14.428,-79.45 15.011,-78.867 15.011,-60.833 ; U38.4@13.208,-75.492 15.008,-75.492 ; U39.4@13.208,-71.525 15.01,-71.525 ; U34.4@13.208,-60.908 14.936,-60.908 15.011,-60.833 ; U35.4@13.208,-56.87 15.01,-56.87 15.011,-56.871 ; U36.4@13.208,-52.78 14.962,-52.78 15.011,-52.73 ; U22.4@13.208,-42.163 14.987,-42.163 ; U26.4@13.208,-38.27 14.943,-38.27 ; U30.4@13.208,-34.15 14.948,-34.15 ; U13.4@13.208,-23.367 14.962,-23.367 ; U13.4@13.208,-23.316 14.962,-23.316 ; U14.4@13.208,-19.328 15.01,-19.328 ; U14.4@13.208,-19.252 14.962,-19.252 ; U19.4@13.208,-15.239 14.579,-15.239 ; P62.2@13.614,-3.296 ccw(c12.557,-2.239) 14.051,-2.239 ccw(c15.546,-2.239) P62.2@14.489,-3.296 ; U37.4@13.808,-79.431 ccw(c13.808,-77.888) 14.899,-78.979 ; U19.4@13.81,-15.258 cw(c13.986,-16.697) 15.011,-15.672 ; P62.2@14.051,-3.734 14.051,-0.096 15.545,1.397 30.15,1.397 ; R1.2@14.935,-9.017 12.116,-9.017 C1.1@12.09,-8.992 11.201,-8.992 10.668,-8.458 ; 14.96,-15.239 14.579,-15.239 ; v2(15.011,-13.386) 15.011,-15.672 ; P56.9@18.052,-95.145 cw(c17.423,-95.775) 18.313,-95.775 cw(c19.204,-95.775) P56.9@18.574,-95.145 ; P56.9@18.313,-94.884 18.313,-96.952 18.288,-96.977 ; C3.1@19.126,-10.033 19.126,-8.814 19.742,-8.198 C2.2@24.155,-8.198 28.073,-8.198 28.55,-7.722 ; C2.2@23.894,-8.459 ccw(c23.265,-9.089) 23.265,-8.198 ccw(c23.265,-7.307) C2.2@23.894,-7.937 ; C2.2@24.416,-8.459 cw(c25.046,-9.089) 25.046,-8.198 cw(c25.046,-7.307) C2.2@24.416,-7.937 ; P36.2@29.044,-8.585 ccw(c28.153,-8.585) 28.783,-7.955 ccw(c29.413,-7.325) P36.2@29.413,-8.216 ; P36.2@29.413,-8.585 28.55,-7.722 ; P60.2@37.109,-3.296 ccw(c36.052,-2.239) 37.546,-2.239 ccw(c39.041,-2.239) P60.2@37.984,-3.296 ; P60.2@37.546,-3.734 37.546,1.326 ; P57.9@38.652,-95.145 cw(c38.022,-95.775) 38.913,-95.775 cw(c39.804,-95.775) P57.9@39.174,-95.145 ; P57.9@38.913,-94.884 38.913,-96.926 38.862,-96.977 ; U17.4@48.362,-66.572 50.039,-66.572 50.8,-65.811 v1(50.8,-59.385) 50.8,-40.462 50.317,-39.98 U48.5@48.844,-39.98 ; U21.4@48.362,-62.508 50.774,-62.508 ; U27.4@48.362,-58.317 50.723,-58.317 ; U31.4@48.362,-54.126 50.774,-54.126 ; U52.5@48.844,-47.193 50.749,-47.193 ; U48.5@48.862,-39.998 ccw(c48.17,-39.305) 49.149,-39.305 ; U48.5@49.149,-39.675 v1(49.149,-37.44) ; P46.1@52.369,-3.296 ccw(c51.312,-2.239) 52.807,-2.239 ccw(c54.301,-2.239) P46.1@53.244,-3.296 ; P46.1@52.807,-3.734 52.807,1.346 ; P58.9@59.302,-95.145 cw(c58.672,-95.775) 59.563,-95.775 cw(c60.454,-95.775) P58.9@59.824,-95.145 ; P58.9@59.563,-94.884 59.563,-96.825 59.715,-96.977 ; R140.1@59.739,-36.527 cw(c59.244,-37.022) 59.944,-37.022 ; R135.1@59.842,-25.375 v1(61.951,-25.375) 61.951,-29.159 61.519,-29.591 60.452,-29.591 ; R144.1@59.868,-30.886 59.868,-30.175 60.452,-29.591 ; R140.1@59.919,-36.347 59.944,-36.373 v1(59.944,-37.44) ; R144.1@60.227,-30.784 cw(c61.213,-30.352) 60.452,-29.591 ; P44.1@64.129,-3.296 ccw(c63.072,-2.239) 64.567,-2.239 ccw(c66.061,-2.239) P44.1@65.004,-3.296 ; P44.1@64.567,-3.734 64.567,1.219 ; v2(67.107,-26.137) U55.1@68.936,-26.137 70.663,-26.137 71.12,-26.594 71.12,-27.965 70.409,-28.677 U55.3@68.936,-28.677 ; 71.977,-60.477 U44.1@73.889,-60.477 ; 72.003,-64.541 U41.3@73.889,-64.541 ; 72.057,-66.622 ccw(c73.228,-65.451) U41.1@73.228,-67.107 ; 72.06,-46.203 U47.3@73.838,-46.203 ; 72.085,-42.774 U51.1@73.838,-42.774 ; 72.238,-48.743 U47.1@73.838,-48.743 ; U51.3@73.194,-40.215 ccw(c72.84,-40.608) 72.466,-40.234 ; U41.1@73.245,-67.1 cw(c72.891,-66.707) 72.517,-67.081 ; U51.3@73.838,-40.234 72.466,-40.234 ; U41.1@73.889,-67.081 72.517,-67.081 ; U44.3@73.889,-57.937 71.952,-57.937 ; P38.2@79.4,-3.296 ccw(c78.343,-2.239) 79.837,-2.239 ccw(c81.332,-2.239) P38.2@80.275,-3.296 ; P38.2@79.837,-3.734 79.837,1.326 ; P59.9@80.028,-95.145 cw(c79.399,-95.775) 80.289,-95.775 cw(c81.18,-95.775) P59.9@80.55,-95.145 ; P59.9@80.289,-94.884 80.289,-96.85 80.162,-96.977 ; R103.1@86.128,-55.182 ccw(c86.804,-55.498) R103.1@86.277,-56.025 ; R112.1@86.162,-48.688 cw(c86.889,-48.218) 86.277,-47.606 ; R99.1@86.206,-62.664 cw(c85.711,-63.159) v1@86.411,-63.159 ; v1(86.411,-63.271) 86.411,-62.509 R99.1@86.385,-62.484 86.385,-60.35 87.046,-59.69 87.046,-56.794 ; R112.1@86.802,-48.275 cw(c87.7,-47.695) 86.944,-46.939 ; R103.1@86.819,-55.505 ccw(c87.853,-55.988) 87.046,-56.794 ; 88.798,-25.731 ccw(c89.585,-25.731) R118.1@89.029,-26.287 ; R124.1@88.798,-23.546 88.798,-26.416 R118.1@88.849,-26.467 91.389,-26.467 91.491,-26.365 ; P40.2@90.962,-90.252 cw(c89.905,-91.309) 91.4,-91.309 cw(c92.894,-91.309) P40.2@91.837,-90.252 ; P40.2@91.4,-89.814 91.4,-96.941 91.364,-96.977 ; 91.492,-31.774 U25.4@94.01,-31.774 ; 91.515,-27.837 U29.4@94.01,-27.837 ; 91.517,-35.711 U23.4@94.01,-35.711 ; 91.566,-39.648 U18.4@94.01,-39.648 ; 91.947,-71.271 U20.4@94.01,-71.271 ; 91.947,-67.207 U24.4@94.01,-67.207 ; v1@91.972,-63.27 U28.4@94.01,-63.27 ; 92.051,-74.753 ccw(c93.41,-73.394) U16.4@93.41,-75.316 ; U16.4@94.01,-75.335 92.633,-75.335 91.694,-74.397 91.694,-60.173 92.533,-59.333 U32.4@94.01,-59.333 ; U15.4@94.01,-43.585 92.328,-43.585 91.491,-42.748 ; v1(96.266,-14.732) 96.266,-23.419 95.784,-23.9 U33.4@94.01,-23.9 92.33,-23.9 91.491,-24.74 91.491,-26.365 ; R128.1@107.239,-22.555 114.503,-22.555 114.63,-22.682 ; R128.1@107.545,-22.223 ccw(c108.347,-21.422) 108.347,-22.555 ; 109.56,-85.538 cw(c110.455,-86.433) P53.2@110.953,-85.268 ; P39.5@110.357,-5.4 ccw(c109.3,-4.343) 110.795,-4.343 ccw(c112.289,-4.343) 111.232,-5.4 ccw(c112.289,-4.343) 112.289,-5.837 ccw(c112.289,-7.332) P39.5@111.232,-6.275 ; P53.2@110.387,-85.048 cw(c109.677,-84.557) 109.677,-85.42 ; P53.2@110.407,-85.778 ccw(c109.677,-86.342) 109.677,-85.42 ; P53.2@110.653,-85.969 ccw(c109.978,-87.55) 108.763,-86.335 ; P50.7@110.896,-49.307 114.611,-49.307 ; P47.2@110.896,-41.077 114.585,-41.077 ; P45.2@110.896,-32.822 114.574,-32.822 ; P43.2@110.896,-24.567 114.559,-24.567 ; P53.2@111.334,-85.838 cw(c112.342,-86.846) 112.342,-85.42 ; P53.2@111.334,-84.962 ccw(c112.44,-83.857) 112.44,-85.42 ; P50.7@111.334,-49.745 cw(c112.391,-50.802) 112.391,-49.307 cw(c112.391,-47.813) P50.7@111.334,-48.869 ; P47.2@111.334,-41.515 cw(c112.391,-42.571) 112.391,-41.077 cw(c112.391,-39.583) P47.2@111.334,-40.639 ; P45.2@111.334,-33.26 cw(c112.391,-34.316) 112.391,-32.822 cw(c112.391,-31.328) P45.2@111.334,-32.384 ; P43.2@111.334,-25.005 cw(c112.391,-26.061) 112.391,-24.567 cw(c112.391,-23.073) P43.2@111.334,-24.129 ; -1.803,-67.31 -1.803,-87.182 -0.111,-88.875 3.785,-88.875 5.639,-90.729 5.639,-95.58 7.036,-96.977 18.288,-96.977 ; -1.803,-67.31 -1.803,-48.514 ; -1.803,-48.514 -1.803,-29.921 ; -1.803,-29.921 -1.803,-6.68 -0.305,-5.182 6.325,-5.182 6.833,-5.69 ; 6.833,-5.69 10.439,-5.69 10.668,-5.918 10.668,-8.458 ; 14.579,-15.239 15.011,-15.672 ; 15.011,-60.833 15.011,-56.871 ; 15.011,-56.871 15.011,-52.73 ; 15.011,-52.73 15.011,-15.672 ; 18.288,-96.977 38.862,-96.977 ; 28.55,-7.722 28.55,-0.203 30.15,1.397 ; 30.15,1.397 106.375,1.397 110.795,-3.023 P39.5@110.795,-5.837 113.127,-5.837 114.63,-7.341 v2(114.63,-11.151) 114.63,-22.682 ; 38.862,-96.977 59.715,-96.977 ; 59.715,-96.977 80.162,-96.977 ; 71.952,-57.937 71.952,-66.516 72.517,-67.081 ; 71.952,-57.937 71.952,-55.505 72.492,-54.966 72.492,-51.13 72.009,-50.648 v1(72.009,-49.632) 72.009,-40.691 72.466,-40.234 ; 80.162,-96.977 91.364,-96.977 ; 86.944,-46.939 86.462,-47.422 R112.1@86.462,-48.412 v1(86.462,-49.632) R108.1@86.462,-51.46 R103.1@86.462,-55.397 86.462,-56.21 87.046,-56.794 ; 86.944,-46.939 90.83,-46.939 91.491,-46.279 91.491,-42.748 ; 91.364,-96.977 106.655,-96.977 108.763,-94.869 108.763,-86.335 ; 91.491,-42.748 91.491,-26.365 ; 108.763,-86.335 109.677,-85.42 ; 109.677,-85.42 113.208,-85.42 114.63,-83.998 114.63,-22.682
  Bottom Layer w0.762: P51.5@3.785,-48.662 v1(15.007,-48.662) ; P51.5@4.222,-49.1 cw(c5.279,-50.157) 5.279,-48.662 cw(c5.279,-47.168) P51.5@4.222,-48.225 ; v2(15.011,-13.386) 16.635,-13.386 Q1.3@16.662,-13.358 ; v1(50.8,-59.385) v1(71.958,-59.385) ; v1(59.944,-37.44) v1(49.149,-37.44) 49.149,-27.483 51.257,-25.375 v1(61.951,-25.375) 66.345,-25.375 v2(67.107,-26.137) ; v1(72.009,-49.632) v1(86.462,-49.632) ; v1(86.411,-63.271) v1@91.694,-63.271 ; v1(96.266,-14.732) 96.266,-13.64 97.282,-12.624 107.518,-12.624 108.991,-11.151 v2(114.63,-11.151)
  other v1: 91.77,-63.297
INPUT_25_B: P35.33 R73.1 U27.6 | length 76.3
  Top Layer w0.254: v1@39.232,-75.376 ccw(c39.022,-75.166) 39.319,-75.166 ccw(c39.616,-75.166) v1@39.406,-75.376 ; v1(39.319,-75.463) 39.319,-63.551 v1(39.98,-62.89) ; v1@39.857,-62.89 cw(c39.56,-62.89) 39.77,-63.1 cw(c39.98,-63.31) v1@39.98,-63.013 ; R73.1@44.954,-61.218 cw(c44.087,-62.085) 45.314,-62.085 cw(c46.54,-62.085) R73.1@45.673,-61.218 ; v1@45.227,-62.803 ccw(c45.017,-62.593) 45.314,-62.593 ccw(c45.611,-62.593) v1@45.401,-62.803 ; v1(45.314,-62.89) R73.1@45.314,-60.858 U27.6@48.362,-60.857 U27.6@48.362,-60.857 ; R73.1@45.8,-61.218 cw(c46.667,-62.085) 46.667,-60.858 cw(c46.667,-59.632) R73.1@45.8,-60.499 ; 47.1,-60.858 ccw(c47.1,-60.196) U27.6@47.569,-60.664 ; 47.105,-60.858 cw(c47.105,-61.514) U27.6@47.569,-61.05 ; P35.33@71.69,-84.618 ccw(c71.534,-84.251) 71.933,-84.251 ; P35.33@71.933,-85.192 71.933,-84.251 ; P35.33@72.176,-84.618 cw(c72.331,-84.251) 71.933,-84.251 ; v1@72.963,-76.389 cw(c72.721,-76.631) 73.064,-76.631 ; v1(73.05,-76.302) 73.064,-76.315 73.064,-83.12 71.933,-84.251 ; 73.064,-76.566 cw(c73.315,-76.566) v1@73.137,-76.389
  Bottom Layer w0.254: v1(39.319,-75.463) 39.338,-75.444 72.193,-75.444 v1(73.05,-76.302) ; v1@39.406,-75.55 cw(c39.662,-75.806) 39.662,-75.444 ; v1@39.406,-75.376 ccw(c39.57,-75.212) 39.57,-75.444 ; v1(39.98,-62.89) v1(45.314,-62.89) ; v1@40.067,-62.977 cw(c40.277,-63.187) 40.277,-62.89 cw(c40.277,-62.593) v1@40.067,-62.803 ; v1@45.227,-62.977 ccw(c45.017,-63.187) 45.017,-62.89 ccw(c45.017,-62.593) v1@45.227,-62.803 ; v1@72.927,-76.302 ccw(c72.63,-76.302) 72.84,-76.092 ccw(c73.05,-75.882) v1@73.05,-76.179
INPUT_26_B: P35.34 R81.1 U31.6 | length 81.8
  Top Layer w0.254: v1@38.038,-76.164 ccw(c37.828,-75.954) 38.125,-75.954 ccw(c38.422,-75.954) v1@38.212,-76.164 ; v1(38.125,-76.251) 38.125,-59.766 38.075,-59.715 v1(39.345,-58.445) ; v1@39.222,-58.445 cw(c38.925,-58.445) 39.135,-58.655 cw(c39.345,-58.865) v1@39.345,-58.568 ; R81.1@44.954,-57.027 cw(c44.087,-57.894) 45.314,-57.894 cw(c46.54,-57.894) R81.1@45.673,-57.027 ; v1@45.227,-58.358 ccw(c45.017,-58.148) 45.314,-58.148 ccw(c45.611,-58.148) v1@45.401,-58.358 ; v1(45.314,-58.445) R81.1@45.314,-56.667 U31.6@48.362,-56.666 U31.6@48.362,-56.666 ; R81.1@45.8,-57.027 cw(c46.667,-57.894) 46.667,-56.667 cw(c46.667,-55.441) R81.1@45.8,-56.308 ; 47.1,-56.667 ccw(c47.1,-56.005) U31.6@47.569,-56.473 ; 47.105,-56.667 cw(c47.105,-57.323) U31.6@47.569,-56.859 ; P35.34@71.492,-82.211 ccw(c70.429,-81.148) 71.933,-81.148 ccw(c73.437,-81.148) P35.34@72.373,-82.211 ; P35.34@71.672,-82.391 ccw(c71.042,-81.761) 71.933,-81.761 ccw(c72.824,-81.761) P35.34@72.194,-82.391 ; v1@71.846,-76.465 cw(c71.636,-76.675) 71.933,-76.675 cw(c72.23,-76.675) v1@72.02,-76.465 ; P35.34@71.933,-82.652 v1(71.933,-76.378)
  Bottom Layer w0.254: v1@38.151,-76.225 v1(38.125,-76.251) 71.806,-76.251 v1(71.933,-76.378) ; v1@38.212,-76.338 cw(c38.422,-76.548) 38.422,-76.251 cw(c38.422,-75.954) v1@38.212,-76.164 ; v1(39.345,-58.445) v1(45.314,-58.445) ; v1@39.432,-58.532 cw(c39.642,-58.742) 39.642,-58.445 cw(c39.642,-58.148) v1@39.432,-58.358 ; v1@45.227,-58.532 ccw(c45.017,-58.742) 45.017,-58.445 ccw(c45.017,-58.148) v1@45.227,-58.358 ; 71.329,-76.251 cw(c71.329,-76.981) v1@71.846,-76.465
INPUT_27_B: P35.35 R51.1 U17.6 | length 57.2
  Top Layer w0.254: R51.1@44.954,-69.473 cw(c44.026,-70.401) 45.339,-70.401 ; R51.1@45.134,-69.293 cw(c44.639,-69.788) 45.339,-69.788 ; v1@45.252,-74.284 ccw(c45.042,-74.074) 45.339,-74.074 ccw(c45.636,-74.074) v1@45.426,-74.284 ; v1(45.339,-74.371) 45.339,-69.139 R51.1@45.314,-69.113 U17.6@48.362,-69.112 U17.6@48.362,-69.112 ; 45.339,-70.279 cw(c46.479,-70.279) R51.1@45.673,-69.473 ; R51.1@45.8,-69.473 cw(c46.667,-70.34) 46.667,-69.113 cw(c46.667,-67.887) R51.1@45.8,-68.754 ; 47.1,-69.113 ccw(c47.1,-68.451) U17.6@47.569,-68.919 ; 47.105,-69.113 cw(c47.105,-69.769) U17.6@47.569,-69.305 ; P35.35@74.23,-84.618 ccw(c74.074,-84.251) 74.473,-84.251 ; P35.35@74.473,-85.192 74.473,-84.251 ; P35.35@74.716,-84.618 cw(c74.871,-84.251) 74.473,-84.251 ; v1@75.503,-75.271 cw(c75.261,-75.513) 75.604,-75.513 ; v1(75.59,-75.184) 75.604,-75.197 75.604,-83.12 74.473,-84.251 ; 75.604,-75.449 cw(c75.855,-75.449) v1@75.677,-75.271
  Bottom Layer w0.254: v1@45.339,-74.32 74.727,-74.32 v1(75.59,-75.184) ; v1@75.467,-75.184 ccw(c75.17,-75.184) 75.38,-74.974 ccw(c75.59,-74.764) v1@75.59,-75.061
INPUT_28_B: P35.36 R59.1 U21.6 | length 70.2
  Top Layer w0.254: v1@40.629,-74.767 ccw(c40.419,-74.557) 40.716,-74.557 ccw(c41.013,-74.557) v1@40.803,-74.767 ; v1(40.716,-74.854) 40.716,-67.437 40.615,-67.335 v1(41.25,-66.7) ; v1@41.127,-66.7 cw(c40.83,-66.7) 41.04,-66.91 cw(c41.25,-67.12) v1@41.25,-66.823 ; R59.1@44.954,-65.409 cw(c44.087,-66.276) 45.314,-66.276 cw(c46.54,-66.276) R59.1@45.673,-65.409 ; v1@45.227,-66.613 ccw(c45.017,-66.403) 45.314,-66.403 ccw(c45.611,-66.403) v1@45.401,-66.613 ; v1(45.314,-66.7) R59.1@45.314,-65.049 U21.6@48.362,-65.048 U21.6@48.362,-65.048 ; R59.1@45.8,-65.409 cw(c46.667,-66.276) 46.667,-65.049 cw(c46.667,-63.823) R59.1@45.8,-64.69 ; 47.1,-65.049 ccw(c47.1,-64.387) U21.6@47.569,-64.855 ; 47.105,-65.049 cw(c47.105,-65.705) U21.6@47.569,-65.241 ; P35.36@74.032,-82.211 ccw(c72.969,-81.148) 74.473,-81.148 ccw(c75.977,-81.148) P35.36@74.913,-82.211 ; P35.36@74.212,-82.391 ccw(c73.582,-81.761) 74.473,-81.761 ccw(c75.364,-81.761) P35.36@74.734,-82.391 ; v1@74.386,-75.83 cw(c74.176,-76.04) 74.473,-76.04 cw(c74.77,-76.04) v1@74.56,-75.83 ; P35.36@74.473,-82.652 v1(74.473,-75.743)
  Bottom Layer w0.254: v1(40.716,-74.854) 40.799,-74.936 73.666,-74.936 v1(74.473,-75.743) ; v1(41.25,-66.7) v1(45.314,-66.7) ; v1@41.337,-66.787 cw(c41.547,-66.997) 41.547,-66.7 cw(c41.547,-66.403) v1@41.337,-66.613 ; v1@45.227,-66.787 ccw(c45.017,-66.997) 45.017,-66.7 ccw(c45.017,-66.403) v1@45.227,-66.613 ; v1@74.35,-75.743 ccw(c74.053,-75.743) 74.263,-75.533 ccw(c74.473,-75.323) v1@74.473,-75.62
INPUT_29_B: P35.37 R50.1 U16.6 | length 35.1
  Top Layer w0.254: P35.37@76.77,-84.618 ccw(c76.614,-84.251) 77.013,-84.251 ; P35.37@77.013,-85.192 77.013,-84.251 ; P35.37@77.256,-84.618 cw(c77.411,-84.251) 77.013,-84.251 ; v1@79.898,-76.693 ccw(c79.688,-76.903) 79.688,-76.606 ccw(c79.688,-76.309) v1@79.898,-76.519 ; v1(79.985,-76.606) 78.588,-76.606 78.144,-77.05 78.144,-83.12 77.013,-84.251 ; R50.1@88.621,-76.606 v1(90.119,-76.606) ; R50.1@89.107,-76.966 cw(c89.974,-77.833) 89.974,-76.606 cw(c89.974,-75.38) R50.1@89.107,-76.247 ; 89.735,-76.67 cw(c89.845,-77.081) v1@90.058,-76.713 ; 89.735,-76.542 ccw(c89.845,-76.132) v1@90.058,-76.5 ; v1@90.032,-76.693 ccw(c89.822,-76.903) 89.822,-76.606 ccw(c89.822,-76.309) v1@90.032,-76.519 ; v1(92.328,-77.875) U16.6@94.01,-77.875 U16.6@94.082,-77.875 ; v1@92.415,-77.962 cw(c92.625,-78.172) 92.625,-77.875 cw(c92.625,-77.578) v1@92.415,-77.788 ; U16.6@93.217,-78.068 ccw(c92.751,-78.534) 92.751,-77.875 ccw(c92.751,-77.216) U16.6@93.217,-77.682
  Bottom Layer w0.254: v1(79.985,-76.606) v1(90.119,-76.606) 91.872,-76.606 92.328,-77.063 v1(92.328,-77.875) ; v1@80.072,-76.693 cw(c80.282,-76.903) 80.282,-76.606 cw(c80.282,-76.309) v1@80.072,-76.519 ; v1@90.032,-76.693 ccw(c89.822,-76.903) 89.822,-76.606 ccw(c89.822,-76.309) v1@90.032,-76.519 ; v1@90.206,-76.693 cw(c90.416,-76.903) 90.416,-76.606 cw(c90.416,-76.309) v1@90.206,-76.519 ; v1@92.241,-77.788 ccw(c92.031,-77.578) 92.328,-77.578 ccw(c92.625,-77.578) v1@92.415,-77.788